# Altium PCB current_integrator.PcbDoc
Units mil, origin at the board's own origin, x right, y up, seen from the top; angles counter-clockwise.
Board outline 3254.13 x 2228.48 mil, 4 copper layers (Top Layer, Ground layer, Power Layer, Bottom Layer); 114 components, 75 nets, 393 pads, 95 vias.
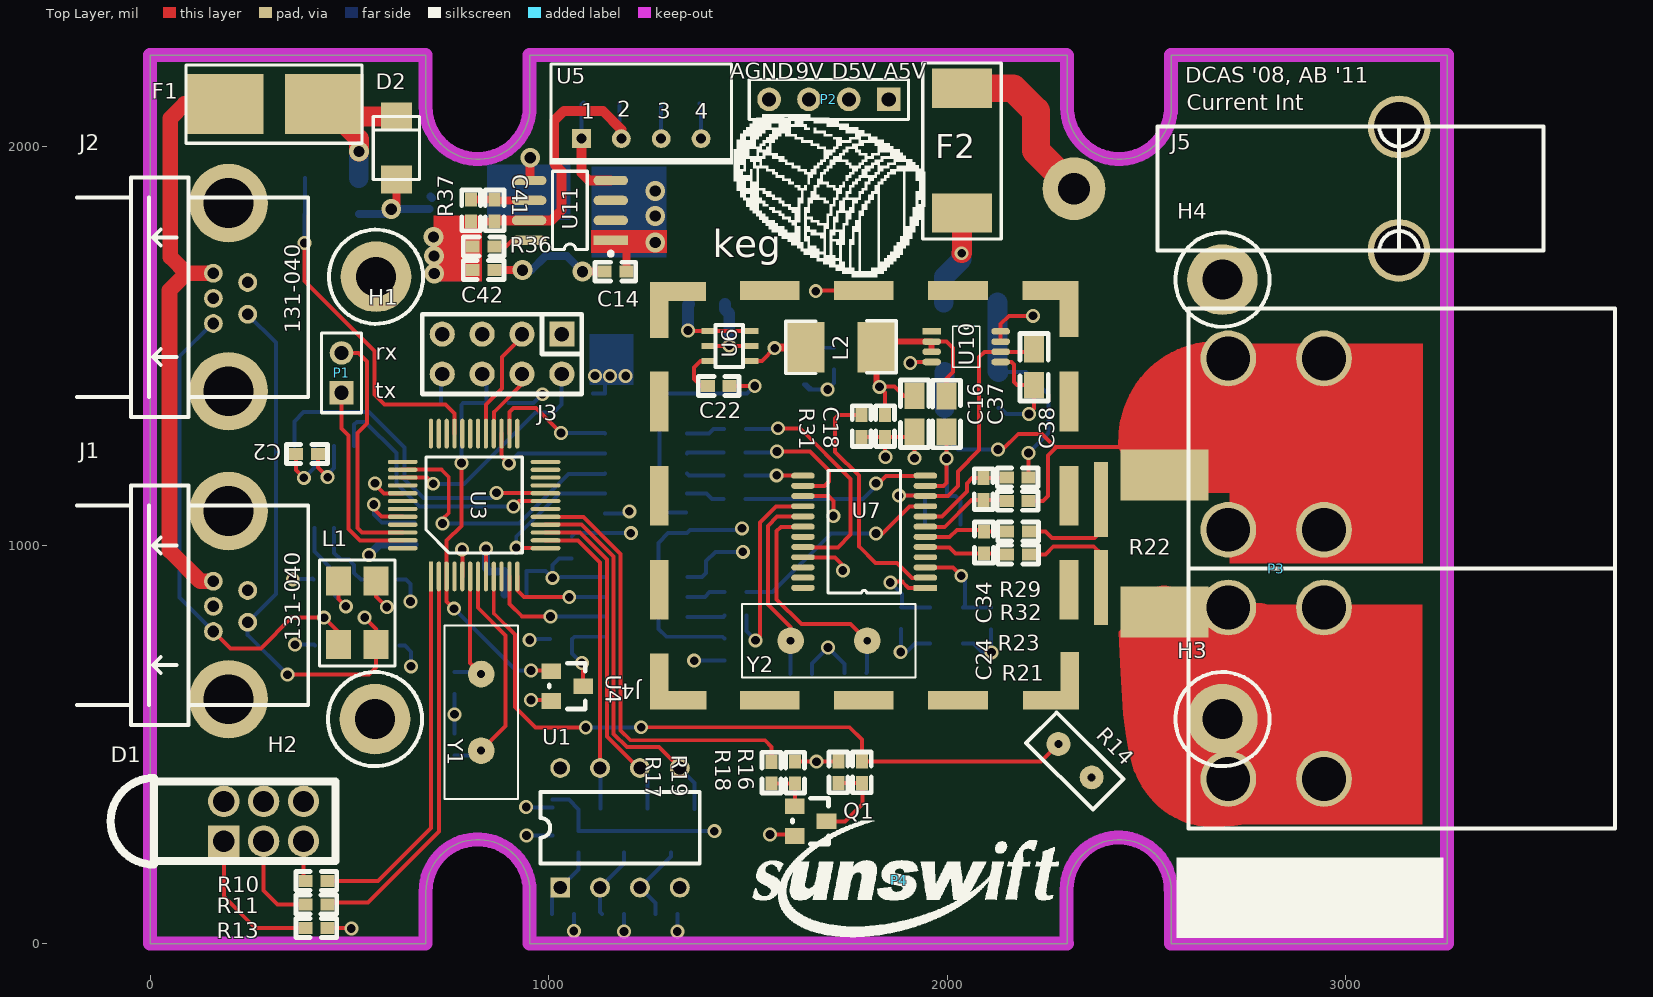
[diagram p0: Top Layer view]
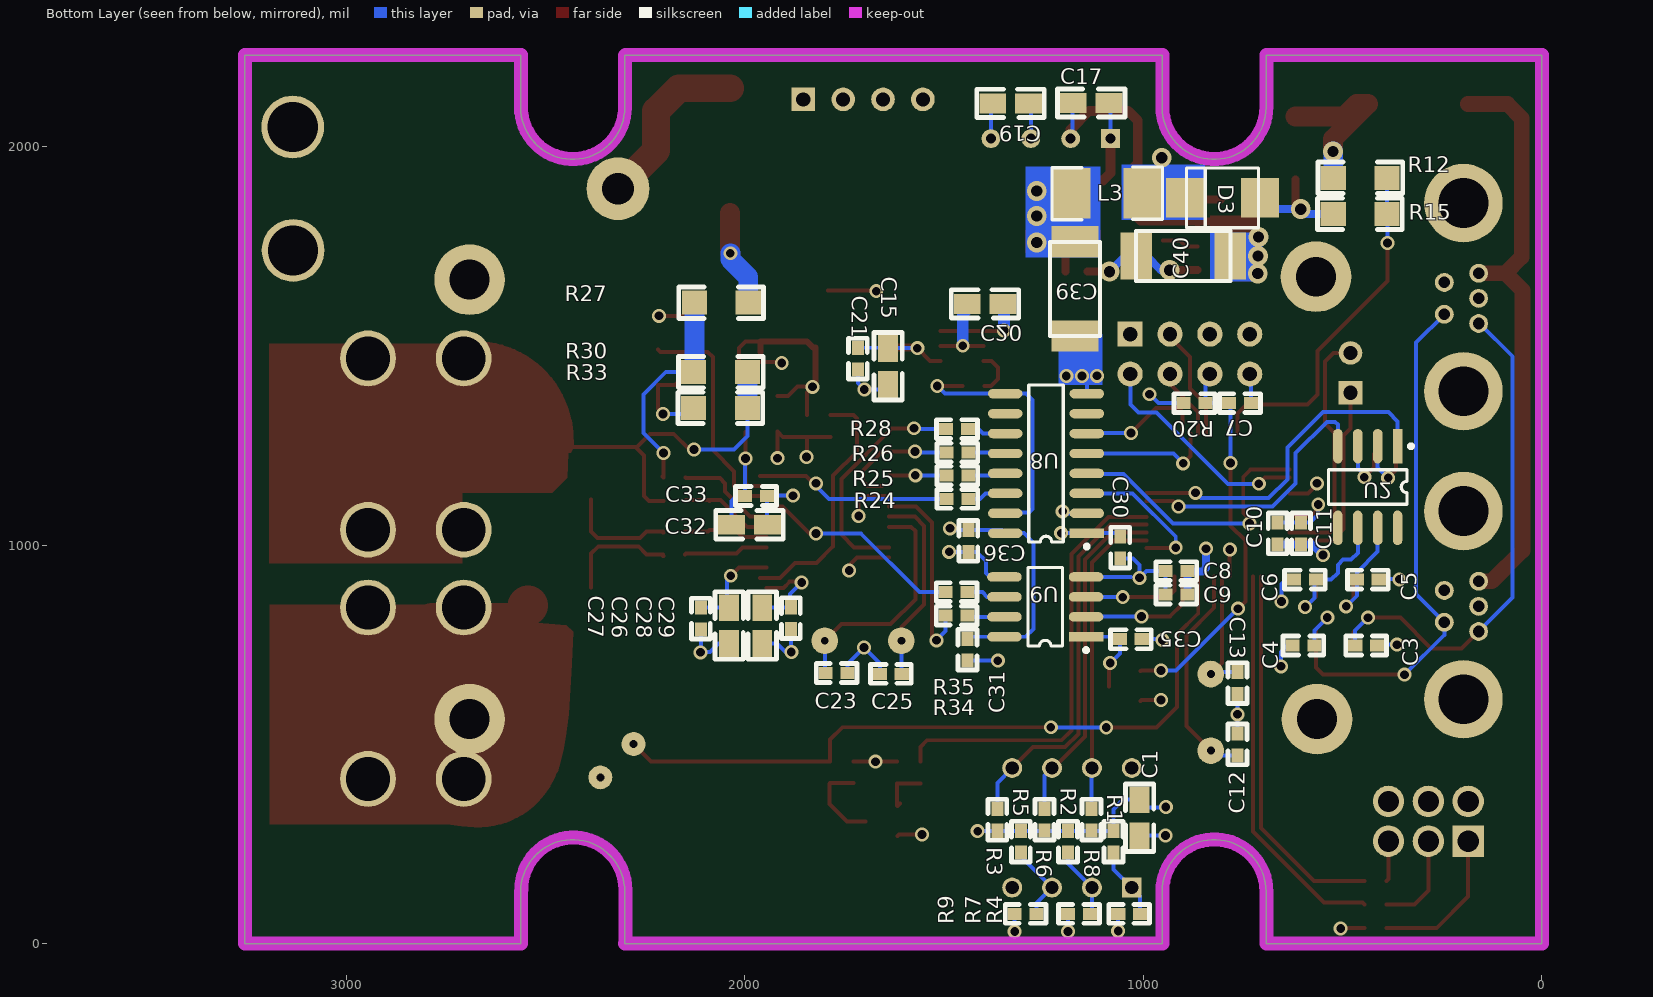
[diagram p1: Bottom Layer view, seen from below]
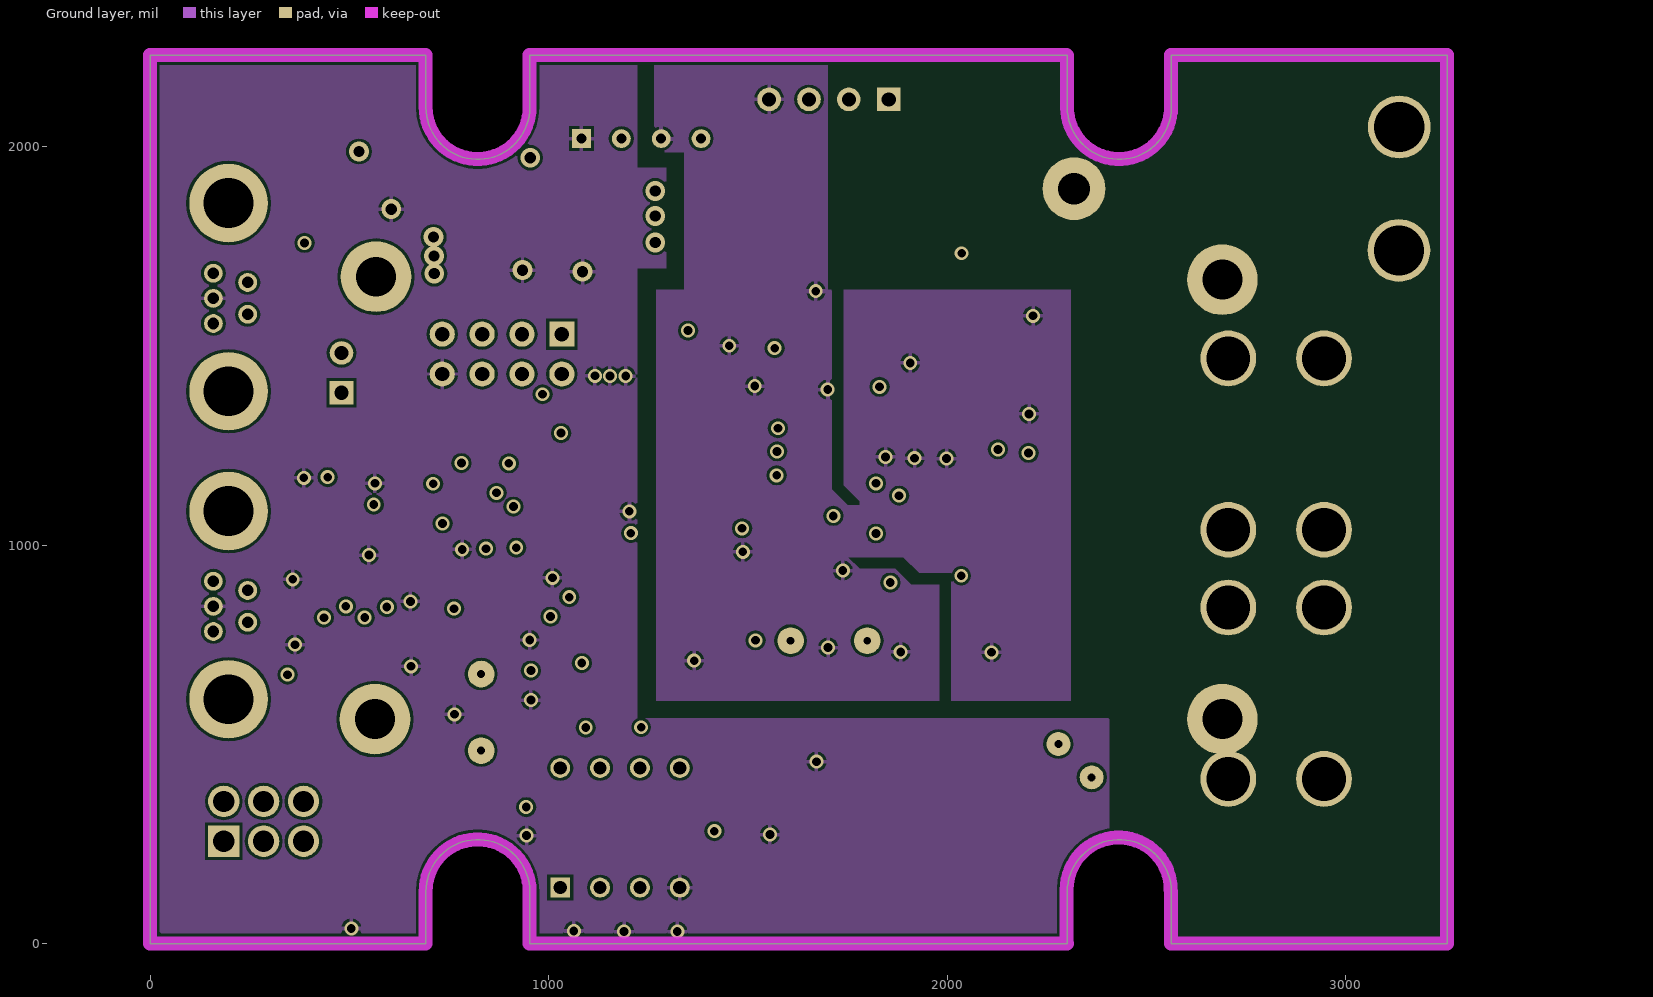
[diagram p2: Ground layer]
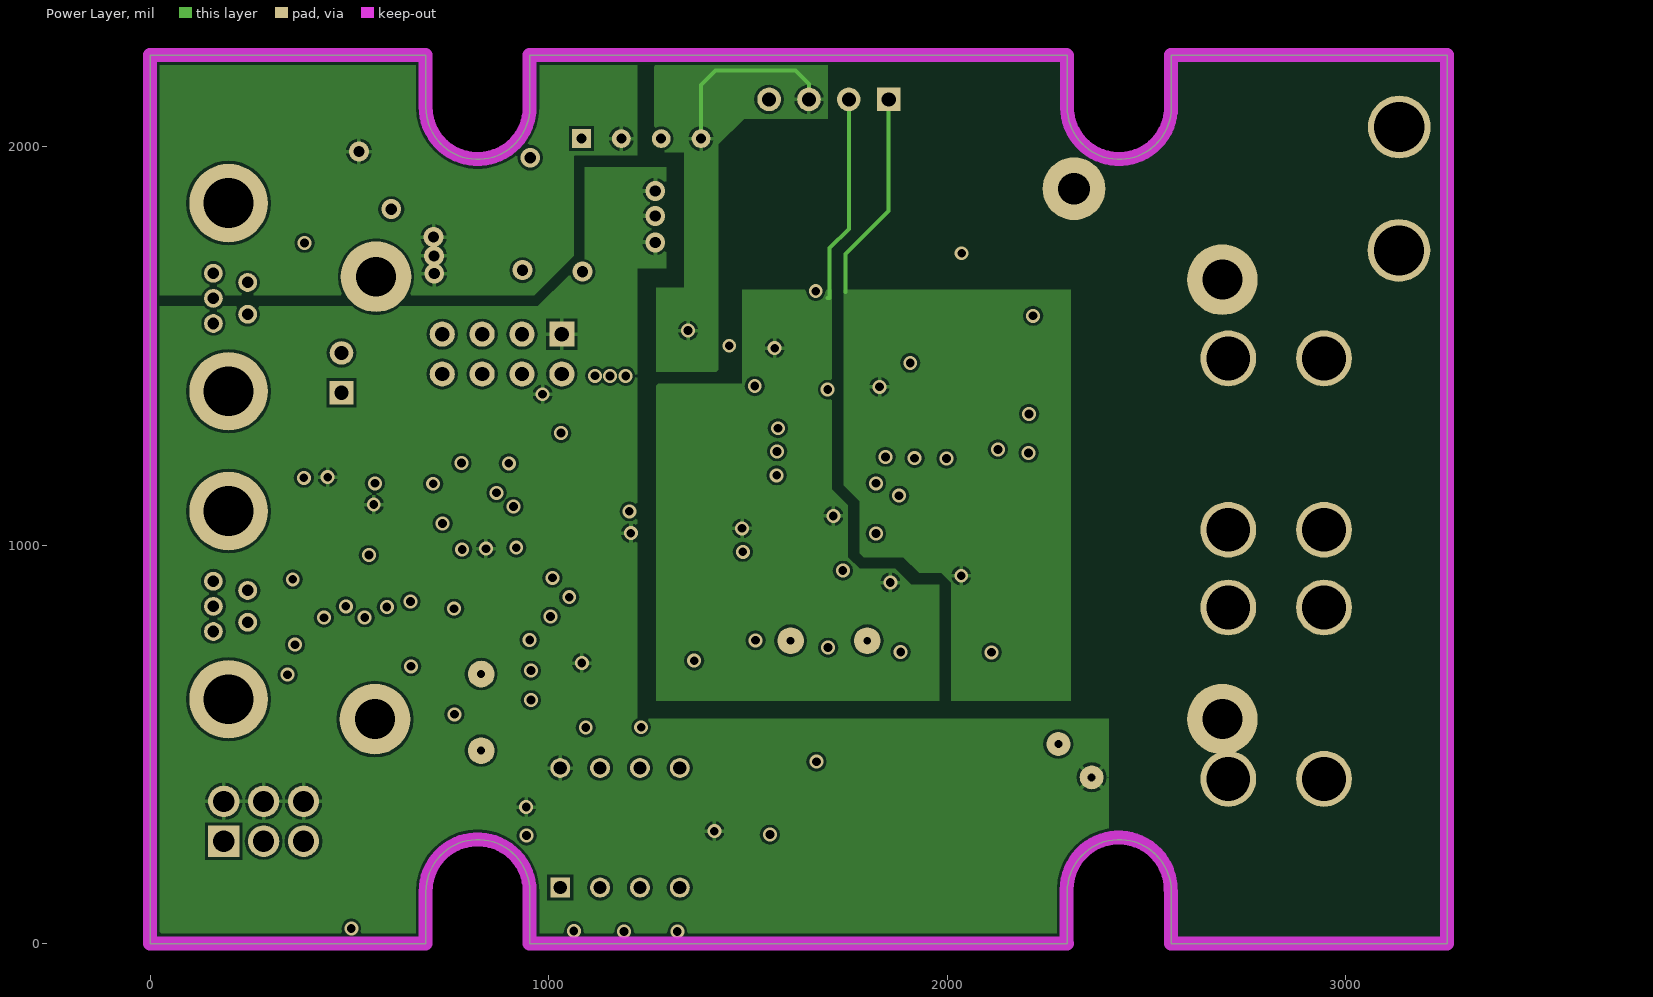
[diagram p3: Power Layer]

## Layer stack, top to bottom
Top Layer: signal copper 1.4
Dielectric: core 12.6, FR-4, Dk 4.8
Ground layer: signal copper 1.4
Dielectric: prepreg 12.6, FR-4, Dk 4.8
Power Layer: signal copper 1.4
Dielectric: core 12.6, FR-4, Dk 4.8
Bottom Layer: signal copper 1.4

## Board outline
0,0 691.92,0.1 691.92,130.44 cw(c822.43,130.44) 952.94,130.44 952.94,0 2300.98,0 2300.98,130.44 cw(c2431.49,130.44) 2562,130.44 2562,0 3254.13,0 3254.13,2228.48 3253.93,2228.48 2562,2228.48 2562,2098.16 cw(c2431.49,2098.16) 2300.98,2098.16 2300.98,2228.48 952.94,2228.48 952.94,2098.16 cw(c822.43,2098.16) 691.92,2098.16 691.92,2228.48 0,2228.48

## Design rules (kind name [scope] priority, off if disabled: settings)
Clearance [All] p1: gap=7.09
ComponentClearance [All] p1 off: gap=7.09 collisioncheckmode=3 verticalgap=100000 showdistances=TRUE
FabricationTestPointUsage TestPointUsage [All] p1: valid=0 allowmultiple=FALSE
FabricationTestpoint Testpoint [All] p1: side=3 testpointundercomponent=TRUE minsize=40 maxsize=100 preferedsize=60 minholesize=0 maxholesize=40 preferedholesize=32 testpointgrid=1 allowsidetop=TRUE allowsidebottom=TRUE usegrid=TRUE gridtolerance=0.01
HoleSize [All] p1: absolutevalues=TRUE maxlimit=393.7 minlimit=1 maxpercent=80.000 minpercent=20.000
HoleToHoleClearance [All] p1: gap=7.09 allowstackedmicrovias=TRUE
MinimumSolderMaskSliver [All] p1: minsoldermaskwidth=0.39
PolygonConnect [All] p1: connectstyle=Relief reliefconductorwidth=10 reliefentries=4 polygonreliefangle="90 Angle"
RoutingCorners [All] p1: cornerstyle=45-Degree minsetback=39.37 maxsetback=39.37
RoutingVias [All] p1: holewidth=16 width=35 viastyle="Through Hole" minholewidth=16 minwidth=35 maxholewidth=16 maxwidth=35
SilkToSilkClearance [All] p1 off: silktosilkclearance=10
SilkscreenOverComponentPads [All] p1 off: minsilkscreentomaskgap=10
SolderMaskExpansion [All] p1: expansion=4
Width [All] p1: maxlimit=393.7 minlimit=10 preferedwidth=10
19 further rules are at their usual default settings.

## Classes and differential pairs
component class U_3V-Switcher-50mA: C39 C40 C41 C42 D3 L3 R36 R37 U11
component class TopLevel: C1 D1 H1 H2 H3 H4 ID1 P1 Q1 R1 R2 R3 R4 R5 R6 R7 R8 R9 R10 R11 R12 R13 R14 R15 R16 R17 R18 R19 TP1 TP2 TP3 TP4 TP5 TP6 TP7 TP8 TP9 TP10 TP11 TP12 U1
component class MCP3909: 9V A5V C15 C16 C17 C18 C19 C20 C21 C22 C23 C24 C25 C26 C27 C28 C29 C30 C31 C32 C33 C34 C35 C36 C37 C38 F2 J4 J5 L2 P2 P3 R21 R22 R23 R24 R25 R26 R27 R28 R29 R30 R31 R32 R33 R34 R35 TP15 U5 U6 U7 U8 U9 U10 Y2
component class LPC11c14: C7 C8 C9 C10 C11 C12 C13 C14 J3 R20 U3 U4 Y1
component class 3V3-CAN-UNISOLATED: C2 C3 C4 C5 C6 D2 F1 J1 J2 L1 U2

## Components (designator, comment, footprint, x,y, rotation, side; value= is the part's Value field where it differs from the comment)
C1 "0.1uF" 0805 1009.29,361.18 r270 bottom
C2 "100nF" 0603 366.14,1228.35 r0 top
C3 "100nF" 0603 413.5,748.03 r0 bottom
C4 "100nF" 0603 570.87,748.03 r0 bottom
C5 "100nF" 0603 464.45,913.39 r180 bottom
C6 "100nF" 0603 567.05,913.39 r0 bottom
C7 "10nF" 0603 785.04,1355.91 r180 bottom
C8 "10nF" 0603 944.61,934.72 r180 bottom
C9 "100nF" 0603 944.61,875.67 r180 bottom
C10 "10nF" 0603 663.13,1001.72 r90 bottom
C11 "100nF" 0603 604.07,1001.72 r90 bottom
C12 "18pF" 0603 763.78,472.44 r90 bottom
C13 "18pF" 0603 763.78,681.1 r270 bottom
C14 "100nF" 0603 1194.96,1685.96 r180 top
C15 "10u" 0805 1640,1403 r90 bottom
C16 "10u" 0805 1918,1284.45 r90 top
C17 "1uF" 0805 1176,2109 r180 bottom
C18 "100nF" 0603 1844,1326 r270 top
C19 "10u" 0805 1288,2108 r0 bottom
C20 "1uF" 0805 1352,1605 r0 bottom
C21 "100nF" 0603 1716,1495 r270 bottom
C22 "18pF" 0603 1454,1399 r180 top
C23 "18pF" 0603 1797,679 r180 bottom
C24 "2.2nF" 0603 2092,1034 r270 top
C25 "100n" 0603 1606,677 r0 bottom
C26 "10u" 0805 2039,753 r90 bottom
C27 "100nF" 0603 2110,843 r270 bottom
C28 "10u" 0805 1956,753 r90 bottom
C29 "100nF" 0603 1884,789 r90 bottom
C30 "100nF" 0603 1057.87,966.22 r90 bottom
C31 "100nF" 0603 1441,710 r90 bottom
C32 "10u" 0805 2033,1051 r180 bottom
C33 "100nF" 0603 1944,1123 r0 bottom
C34 "2.2nF" 0603 2091,1168 r270 top
C35 "100nF" 0603 1003.94,763.78 r0 bottom
C36 "100nF" 0603 1439,983 r90 bottom
C37 "0.1uF" 0805 1998,1374 r270 top
C38 "1uF" 0805 2218,1401 r90 top
C39 "4u7 35V" MCCT-CASEC 1171.45,1760.76 r270 bottom
C40 "4u7 35V" MCCT-CASEC 781.69,1725.33 r0 bottom
C41 "1n" 0603 864.37,1811.94 r90 top
C42 "100nF" 0603 809.25,1689.89 r0 top
D1 "1882-2781" LED_TRILEVEL 185.01,257.06 r90 top
D2 "12V Transient Suppressor" SMA 618.11,1996.06 r90 top
D3 "MBRS130" SMB 801.37,1870.99 r0 bottom
F1 "125mA/3A" LITTELFUSE-154 311.02,2106.3 r0 top
F2 "125mA/3A" LITTELFUSE-154-250V 1956.29,1771.98 r90 top
H1 "HOLE" M2.5 566.93,1673.23 r0 top
H2 "HOLE" M2.5 564.17,563.39 r0 top
H3 "HOLE" M2.5 2690.16,563.39 r0 top
H4 "HOLE" M2.5 2690.16,1665.75 r0 top
J1 "CON5-S" TRIAD5F 244.85,886.19 r90 top
J2 "CON5-S" TRIAD5F 244.85,1658.83 r90 top
J3 "LPC SWD Connector" IDC8 1033.07,1529.13 r180 top
J4 "Shield" BMIS-203-SHIELD 2328.74,1662.01 r180 top locked
J5 "POWERPOLE(MINI)" POWERPOLE25A 1782.8,1893.96 r270 top
L1 "CHOKE" Epcos-Choke 472.44,909.45 r0 top
L2 "CHOKE" 1812 1644.83,1496 r0 top
L3 "330uH" 1812 1002.16,1882.81 r0 bottom
P1 "UART" HDR1X2 480.32,1381.89 r90 top
P2 "Header 4" HDR1X4 1853,2118 r180 top
P3 "MiniPowerclaw" MiniPowerpole-Hrz 2704.88,843.39 r0 top (schematic designator P1)
P4 "SUN_LOGO" SUNSWIFTLOGO 1879,159 r0 top (schematic designator P1)
Q1 "ZXM61N02F" SOT23-3 1616.85,345.09 r270 top
R1 "0R" 0603 1074.8,228.23 r90 bottom
R2 "0R" 0603 1188.98,228.35 r90 bottom
R3 "0R" 0603 1366.14,338.46 r270 bottom
R4 "0R" 0603 1062.99,74.8 r180 bottom
R5 "0R" 0603 1307.09,228.35 r90 bottom
R6 "0R" 0603 1248.03,338.58 r270 bottom
R7 "0R" 0603 1188.98,74.8 r180 bottom
R8 "0R" 0603 1129.92,338.58 r270 bottom
R9 "0R" 0603 1322.83,74.8 r180 bottom
R10 "1K" 0603 389.88,157.48 r0 top
R11 "1K" 0603 389.76,98.43 r0 top
R12 "100K" 1206 388.62,1921.26 r0 bottom
R13 "1K" 0603 389.88,39.37 r0 top
R14 "NTC, 10k" NTC_EPCOS 2362.2,417.32 r135 top
R15 "20K" 1206 523.62,1830.71 r180 bottom
R16 "9k1" 0603 1785.68,457.59 r270 top
R17 "100R" 0603 1559.06,401.57 r90 top
R18 "0R" 0603 1726.62,457.59 r270 top
R19 "10K" 0603 1618.11,401.69 r90 top
R20 "10k" 0603 844.09,1355.91 r0 bottom
R21 "7k15" 0603 2150,976 r0 top
R22 "BVR, 0R0005" BVR 2368.11,1437.01 r270 top
R23 "7k15" 0603 2150,1034 r0 top
R24 "0R" 0603 1494,1116 r180 bottom
R25 "0R" 0603 1494,1174 r180 bottom
R26 "0R" 0603 1494,1232 r180 bottom
R27 "330k" 1206 2126,1608 r180 bottom
R28 "0R" 0603 1495,1291 r180 bottom
R29 "7k15" 0603 2149,1170 r0 top
R30 "1k2" 1206 1993,1434 r0 bottom
R31 "1k" 0603 1785,1326 r270 top
R32 "7k15" 0603 2149,1111 r0 top
R33 "0R" 1206 2128,1344 r180 bottom
R34 "0R" 0603 1496,823 r180 bottom
R35 "0R" 0603 1496,882 r180 bottom
R36 "100k" 0603 864.37,1748.95 r180 top
R37 "1R2" 0603 805.31,1811.94 r90 top
U1 "24AA256" DIP8 1028.98,140.71 r90 top
U2 "SN65HVD232" SO8 437.01,1145.67 r0 bottom
U3 "LPC11C14" Quad48-LPC11c14 704.72,921.26 r90 top
U4 "XC61CN2002MR" SOT23-3 1006.61,683.67 r270 top
U5 "NKE1209SC" NPSIP4 1232.28,2019.68 r0 top
U6 "Pq1R30" SOT23-6 1404.94,1536.8 r270 top
U7 "MCP3909" SOP24-wide 1945,892.64 r180 top
U8 "IL717" SO16 1244.09,1204.72 r90 bottom
U9 "IL711" SO8 1246.06,845 r90 bottom
U10 "LTC6652" "SOP8 - duplicate" 1960.77,1536 r0 top
U11 "LTC1474" SO8 1053.34,1839.5 r90 top
Y1 "12 MHz" HC49/4H#1 830.71,797.83 r270 top
Y2 "3.579545" HC49/4H#2 1485.54,760 r0 top

## Footprints (in the part's own frame and the unit in brackets; to place one, negate y for a bottom-side part, rotate by r counter-clockwise, add the part's x,y. Pads: shape width x height; smd on the part's side, far side on the other; paste and mask are expansions set on the pad)
0603 [mil]
  rect 35.43x30 smd: 1(0,0) 2(55,0)
  silkscreen extent -24,-24 79,24
0805 [mm]
  rect 1.7x1.27 smd: 1(0,0) 2(2.286,0)
  silkscreen extent -1,-0.9 3.3,0.9
1206 [mil]
  rect 62.99x60 smd: 1(0,0) 2(135,0)
  silkscreen extent -39,-39 173,39
1812 [mm]
  rect 2.4x3.2 smd: 1(0,0) 2(4.5,0)
  silkscreen extent -1.27,-1.66 5.77,1.7
BMIS-203-SHIELD [mm]
  rect 3.8x1.2 smd: 1(13.67,0.6) ""(7.67,26.7) ""(7.67,0.6) ""(13.67,26.7) ""(19.67,26.7) ""(19.67,0.6)
  rect 1.2x3.57 smd: ""(0.55,25.415) ""(0.6,1.785) ""(26.7,25.515) ""(26.7,1.835)
  rect 1.2x3.8 smd: ""(0.6,19.67) ""(0.6,13.67) ""(0.6,7.67) ""(26.7,7.67) ""(26.7,13.67) ""(26.7,19.67)
  rect 3.57x1.2 smd: ""(1.735,26.7) ""(1.785,0.6) ""(25.465,26.7) ""(25.5,0.65)
BVR [mm]
  rect 4.8x0.9 smd: 1(13.8,0.45) 2(8.2,0.45)
  rect 3.25x5.6 smd: 3(15.375,4.5) 4(6.625,4.5)
DIP8 [mil]
  rect 50x50 hole 33: 1(0,0)
  round 50 hole 33: 2(0,-100) 3(0,-200) 4(0,-300) 5(300,-300) 6(300,-200) 7(300,-100) 8(300,0)
  silkscreen extent 60,-350 240,50
Epcos-Choke [mm]
  rect 1.6x1.85 smd paste+0: 1(0,-4.05)
  rect 1.6x1.85 smd: 2(2.4,-4.05) 3(2.4,0) 4(0,0)
  silkscreen extent -1.2,-5.4 3.6,1.35
HC49/4H#1 [mm]
  round 1.7 hole 0.508: 1(3.085,0) 2(7.965,0)
  silkscreen extent 0,-2.35 11.05,2.35
HC49/4H#2 [mm]
  round 1.7 hole 0.5: 1(3.085,0) 2(7.965,0)
  silkscreen extent 0,-2.35 11.05,2.35
HDR1X2 [mm] "Connector; Header; 2 Position"
  rect 1.5x1.5 hole 0.914: 1(0,0)
  round 1.5 hole 0.914: 2(2.54,0)
  silkscreen extent -1.27,-1.27 3.81,1.27
HDR1X4 [mm] "Connector; Header; 4 Position"
  rect 1.5x1.5 hole 0.9: 1(0,0)
  round 1.5 hole 0.9: 2(2.54,0) 3(5.08,0) 4(7.62,0)
  silkscreen extent -1.27,-1.27 8.89,1.27
IDC8 [mm]
  rect 1.6x1.6 hole 0.914: 1(0,0)
  round 1.6 hole 0.914: 2(0,2.54) 3(2.54,0) 4(2.54,2.54) 5(5.08,0) 6(5.08,2.54) 7(7.62,0) 8(7.62,2.54)
  silkscreen extent -1.27,-1.27 8.89,3.81
LED_TRILEVEL [mm]
  rect 2x2 hole 1.346: 1(0,0)
  round 2 hole 1.346: 2(0,-2.54) 3(0,-5.08) 4(2.54,-5.08) 5(2.54,-2.54) 6(2.54,0)
  silkscreen extent -1.49,-7.11 4.03,7.21
LITTELFUSE-154 [mm]
  rect 5x3.81 smd: 1(-3.185,0) 2(3.185,0)
  silkscreen extent -5.6,-2.51 5.6,2.5
LITTELFUSE-154-250V [mm]
  rect 2.5x3.81 smd: 1(1.55,-2.05) 2(9.5,-2.05)
  silkscreen extent -0.1,-4.56 11.1,0.45
M2.5 [mm]
  round 4.5 hole 2.54: 1(0,0)
  silkscreen extent -3,-3 3,3
MCCT-CASEC [mm]
  rect 2x3 smd: 1(0,0) 2(6,0)
  silkscreen extent 0,-1.6 6,1.6
MiniPowerpole-Hrz [mil]
  round 140 hole 110: 1(0,195) 1(0,625) 1(240,195) 1(240,625) 2(0,-430) 2(0,0) 2(240,-430) 2(240,0)
  silkscreen extent -100,-555 970,750
NPSIP4 [mm]
  rect 1.2x1.2 hole 0.635: 1(-3.81,0)
  round 1.2 hole 0.635: 2(-1.27,0) 3(1.27,0) 4(3.81,0)
  silkscreen extent -5.85,-1.65 5.86,4.75
NTC_EPCOS [mil]
  round 60 hole 20: 1(0,0) 2(118.11,0)
  silkscreen extent -59,-53 177,55
POWERPOLE25A [mil]
  round 157.48 hole 80: 1(0,535)
  silkscreen extent -156,744 156,1713
Quad48-LPC11c14 [mm]
  rect 1.9x0.27 smd: 1(0,0)
  oval 1.9x0.27 smd: 2(0,-0.5) 3(0,-1) 4(0,-1.5) 5(0,-2) 6(0,-2.5) 7(0,-3) 8(0,-3.5) 9(0,-4) 10(0,-4.5) 11(0,-5) 12(0,-5.5) 25(9.1,-5.5) 26(9.1,-5) 27(9.1,-4.5) 28(9.1,-4) 29(9.1,-3.5) 30(9.1,-3) 31(9.1,-2.5) 32(9.1,-2) 33(9.1,-1.5) 34(9.1,-1) 35(9.1,-0.5) 36(9.1,0)
  oval 0.27x1.9 smd: 13(1.8,-7.3) 14(2.3,-7.3) 15(2.8,-7.3) 16(3.3,-7.3) 17(3.8,-7.3) 18(4.3,-7.3) 19(4.8,-7.3) 20(5.3,-7.3) 21(5.8,-7.3) 22(6.3,-7.3) 23(6.8,-7.3) 24(7.3,-7.3) 37(7.3,1.8) 38(6.8,1.8) 39(6.3,1.8) 40(5.8,1.8) 41(5.3,1.8) 42(4.8,1.8) 43(4.3,1.8) 44(3.8,1.8) 45(3.3,1.8) 46(2.8,1.8) 47(2.3,1.8) 48(1.8,1.8)
  silkscreen extent 1.48,-5.81 7.61,0.32
SMA [mm]
  rect 1.8x2 smd: A(-2,0) K(2,0)
  silkscreen extent -2,-1.48 2,1.48
SMB [mm]
  rect 2.4x2.5 smd: A(-2.385,0) K(2.385,0)
  silkscreen extent -2.28,-1.9 2.3,1.9
SO8 [mm]
  rect 0.6x2.2 smd: 1(-1.905,-2.6)
  oval 0.6x2.2 smd: 2(-0.635,-2.6) 3(0.635,-2.6) 4(1.905,-2.6) 5(1.905,2.6) 6(0.635,2.6) 7(-0.635,2.6) 8(-1.905,2.6)
  silkscreen extent -2.88,-2.72 2.5,1.1
SO16 [mm]
  rect 0.6x2.2 smd: 1(-4.445,-2.6)
  oval 0.6x2.2 smd: 2(-3.175,-2.6) 3(-1.905,-2.6) 4(-0.635,-2.6) 5(0.635,-2.6) 6(1.905,-2.6) 7(3.175,-2.6) 8(4.445,-2.6) 9(4.445,2.6) 10(3.175,2.6) 11(1.905,2.6) 12(0.635,2.6) 13(-0.635,2.6) 14(-1.905,2.6) 15(-3.175,2.6) 16(-4.445,2.6)
  silkscreen extent -5.42,-2.72 5,1.1
"SOP8 - duplicate" [mm]
  rect 1.2x0.42 smd: 1(0,0)
  oval 1.2x0.42 smd: 2(0,-0.65) 3(0,-1.3) 4(0,-1.95) 5(4.4,-1.95) 6(4.4,-1.3) 7(4.4,-0.65) 8(4.4,0)
  silkscreen extent 1.33,-2.28 3.07,0.33
SOP24-wide [mm]
  rect 1.5x0.38 smd: 1(0,0)
  oval 1.5x0.38 smd: 2(0,-0.65) 3(0,-1.3) 4(0,-1.95) 5(0,-2.6) 6(0,-3.25) 7(0,-3.9) 8(0,-4.55) 9(0,-5.2) 10(0,-5.85) 11(0,-6.5) 12(0,-7.15) 13(7.8,-7.15) 14(7.8,-6.5) 15(7.8,-5.85) 16(7.8,-5.2) 17(7.8,-4.55) 18(7.8,-3.9) 19(7.8,-3.25) 20(7.8,-2.6) 21(7.8,-1.95) 22(7.8,-1.3) 23(7.8,-0.65) 24(7.8,0)
  silkscreen extent 1.58,-7.48 6.22,0.33
SOT23-3 [mm]
  rect 1x1.25 smd: 1(0,0) 2(1.905,0) 3(0.965,2.032)
  silkscreen extent -0.51,-0.13 2.41,2.16
SOT23-6 [mm]
  rect 0.4x0.9 smd: 1(0,-0.1) 2(0.95,-0.1) 3(1.9,-0.1) 4(1.9,2.65) 5(0.95,2.65) 6(0,2.65)
  silkscreen extent -0.4,0.35 2.3,2.1
SUNSWIFTLOGO [mil] "Sunswift Logo"
  silkscreen extent -367,-141 401,150
TRIAD5F [mil]
  round 196.85 hole 125: 0(-273,48) 0(199,48)
  round 47.24 hole 29: 1(0,0) 2(23,86) 3(-40,86) 4(-103,86) 5(-80,0)
  silkscreen extent -337,-152 263,428

## Part data
C1 C2 C3 C4 C5 C6 C7 C8 C9 C10 C11 C12 C13 C14 C15 C16 C17 C18 C19 C20 C21 C22 C23 C24 C25 C26 C27 C28 C29 C30 C31 C32 C33 C34 C35 C36 C37 C38 C41 C42: library part CAP, "Capacitor"
C39 C40: library part "Cap Pol3", "Polarized Capacitor (Surface Mount)"
D1: library part LED-TRILEVEL, "Three level LED"
D2: library part DIODE, "Diode"
D3: library part "D SCHOTTKY", "Schottky Diode"
F1 F2: library part FUSE2, "Fuse"
H1 H2 H3 H4: "Hole"
J1 J2: "Connector, 2 pin, with shield @ S"
J3: library part LPCLink_Connector
J4: library part Socket, "Socket"
J5: library part CON1
L2: library part INDUCTOR, "Inductor"
L3: library part Inductor, "Inductor"
P1: library part "Header 2", "Header, 2-Pin"
P2: "Header, 4-Pin"
P3: library part SUN_LOGO
Q1: "1.7A, 20V N-Channel Enhancement mode FET"
R1 R2 R3 R4 R5 R6 R7 R8 R9 R10 R11 R12 R13 R15 R16 R17 R18 R19 R20 R21 R23 R24 R25 R26 R28 R29 R30 R31 R32 R33 R34 R35 R36 R37: library part RES1, "Resistor"
R14: library part "Res Varistor", "Varistor (Voltage-Sensitive Resistor)"
R22: library part BVR
R27: library part RES1
U2: "3.3V CAN Transciever"
U3: library part LPC11C14_Full
U4: library part XC61F, "SOT23 reset generator"
U5: library part LME1209S, "Isolated 250mW Single Output"
U7: "Energy Measurement IC"
U8: "Isoloop IL717 - www.nve.com"
U9: "IL711 Optical Isolator"
U11: "Step-down converter"
Y1 Y2: library part CRYSTAL, "Crystal"

## Free pads (board coordinates)
  round 157.48 hole 125.98: 0(3132.85,1739.27) 0(3133.87,2048.67)

## Via types
v1: diameter 35, hole 22, Top Layer to Bottom Layer, 84 vias
v2: diameter 50, hole 28, Top Layer to Bottom Layer, 11 vias

## Nets (pads, with @x,y where several pads share a name; then routed paths per layer and width w, separated by ;. In a path a pad name is that pad's centre, name@x,y a point inside that pad or via, vN(x,y) a via of type N, cw(c..) or ccw(c..) an arc to the next point about the centre after c; other vN are vias at no path point)
2V5REF: C32.2 C33.1 C38.2 U7.10 U10.6 | length 788.5
  Top Layer w10: v1(1879,1124) 1943.95,1124 U7.10 2001.95,1122.95 2027,1148 2027,1185 2080,1238 2080,1472 2092.82,1484.82 U10.6 2211.82,1484.82 C38.2
  Bottom Layer w10: v1(1879,1124) 1943,1124 C33.1 1944,1052 C32.2
3V3: C1.1 C2.2 C8.2 C9.2 C10.2 C11.2 C14.1 C30.2 C35.2 C39.1 D1.4 D1.5 D1.6 J3.1 L3.2 R1.2 R2.2 R3.2 R5.2 R6.2 R8.2 R14.1 R20.2 U1.8 U2.3 U3.8 U3.44 U4.3 U8.1 U9.1 U11.1 | length 1787
  Top Layer w10: C2.2 421.14,1194.83 v1(445.68,1170.3) ; v1(561.22,1101.7) 561.22,1090.91 580.93,1071.2 633.52,1071.2 U3.44 ; U3.8 842.52,990.82 v1(842.68,990.98) ; v1(1083.05,704.08) 1086.61,700.51 U4.3
  Top Layer w20: U11.1 1261.53,1764.5 v2@1266.68,1759.35 ; C14.1 1194.96,1751.62
  Bottom Layer w10: v1(445.68,1170.3) 445.68,1177.26 462.01,1193.6 U2.3 ; v1(561.22,1101.7) 561.22,1076.75 581.24,1056.72 C11.2 C10.2 ; R20.2 962.4,1355.91 v1(984.78,1378.29) ; v1(943.62,342.67) 944.79,341.5 C1.1@1009.29,341.5 ; C1.1 1050.67,361.18 1074.8,337.05 R1.2 1365.91,283.23 1366.98,282.15 v1(1415.61,282.15) ; C30.2 1066.38,1029.72 U8.1 v1(1206.16,1029.72) ; v1(1083.05,704.08) 1058.94,728.19 C35.2 1065.16,770 U9.1
  Bottom Layer w20: v1(842.68,990.98) 842.68,942.32 851,934 888.88,934 C8.2 C9.2
  other v2: 1267.42,1759.35 1267.42,1825.76 1267.42,1888.49
9V: C19.2 C20.1 P2.3 U5.4 U6.1 U6.6 | length 803.5
  Top Layer w10: v1(1349.61,1538) 1350.8,1536.8 U6.1 U6.6
  Power Layer w10: U5.4 1382.28,2154.28 1419,2191 1619,2191 1653,2157 P2.3
  Bottom Layer w10: U5.4@1374.02,2027.95 U5.4 1382.28,2103.72 C19.2
  Bottom Layer w30: v1(1349.61,1538) 1349.61,1602.61 C20.1
12V: C17.1 C40.1 C41.1 C42.1 D2.K F1.2 R12.2 R36.2 R37.1 U5.2 U11.7 | length 1328.3
  Top Layer w10: C41.1 C41.1@867.46,1808.85
  Top Layer w20: C42.1 809.37,1690.01 R36.2 805.31,1753 R37.1 C41.1
  Top Layer w25: C41.1 866.92,1814.5 U11.7 1006.5,1814.5 1032,1840 1032,1938.62 1014,1956.62 1014,2065 1038,2089 1136,2089 1182.28,2042.72 U5.2
  Top Layer w50: v2(524.07,1987.26) 524.07,2018.65 F1.2 464.54,2106.3 496.03,2074.8 D2.K
  Bottom Layer w10: v2@523.62,1986.81 v2(524.07,1987.26) ; C17.1@1177.17,2110.24 1177.17,2024.8 U5.2
  Bottom Layer w50: R12.2 v2@523.62,1986.81
  other v2: 712.98,1681.03 712.03,1725.42 711.22,1772.5
12V_MEASURE: R12.1 R15.2 U3.33 | length 887.4
  Top Layer w10: v1(387.52,1757.89) 387.52,1662.06 563,1486.58 563,1378.08 588.64,1352.44 741.25,1352.44 763.78,1329.91 U3.33
  Bottom Layer w10: v1(387.52,1757.89) 387.52,1829.61 R15.2 R12.1
/RESET: C7.1 J3.6 R20.1 U3.3 U4.1 | length 985.9
  Top Layer w10: v1(762.56,840.45) 744.09,858.91 U3.3 744.09,1011.09 781.13,1048.13 v1(781.13,1205.76) ; v1(955.4,685.28) 1005,685.28 U4.1
  Bottom Layer w10: v1(762.56,840.45) 917.73,685.28 v1(955.4,685.28) ; v1(781.13,1205.76) 781.13,1352 C7.1 R20.1 844.09,1418.11 J3.6
A5V: C16.2 C18.1 C26.2 C27.1 C37.1 L2.2 P2.1 U7.3 U10.2 U10.3 | length 1418
  Top Layer w10: C18.1 1844,1383 v1(1830,1397) 1829,1398 1868,1398 1891.55,1374.45 C16.2 ; U7.3@1945,943.23 2014.77,943.23 v1(2035,923) ; U10.2 1997.59,1510.41 2014,1494 2014,1434 1998,1418 C37.1
  Top Layer w15: v1@1829,1398 1822,1405 L2.2 1829,1496 1843.41,1510.41 U10.2 U10.3 U10.3@1960.59,1485
  Power Layer w10: 1745,1635 1745,1730 1853,1838 P2.1
  Bottom Layer w10: v1(2035,923) 2044,914 2044,848 C26.2 C27.1
CAN_H: C3.2 J1.4 J2.4 L1.1 | length 1337.2
  Top Layer w10: J1.4 201.28,740.76 278.09,740.76 355.14,817.8 v1(436.1,817.8) 472.44,781.46 L1.1
  Bottom Layer w10: J1.4 74.08,867.96 74.08,1473.63 156.28,1555.83 J2.4 ; v1(436.1,817.8) 468.5,785.4 C3.2
CAN_L: C4.1 J1.5 J2.5 L1.2 | length 1454.8
  Top Layer w10: v1(345.06,674.78) 548.93,674.78 566.93,692.78 L1.2 566.93,789.78 v1(538.43,818.27)
  Bottom Layer w10: J2.5 316.03,1507.65 316.03,877.37 J1.5 244.85,774.99 v1(345.06,674.78) ; v1(538.43,818.27) 570.87,785.84 C4.1
D5V: C15.2 C21.1 C28.2 C29.2 C31.2 C36.2 L2.1 P2.2 U6.4 U7.1 U7.15 U8.16 U9.8 | length 1801.2
  Top Layer w10: U6.4 1535,1462 v1(1567,1494) ; U7.15 1702.05,1122.95 1714,1111 v1(1714,1073) ; v1(1857,906) 1859,908 1887,908 1902.95,892.05 U7.1@1945,892.05
  Top Layer w20: v1(1567,1494) 1569,1496 L2.1
  Power Layer w10: 1700,1620 1705,1620 1705,1745 1753,1793 P2.2
  Bottom Layer w10: C31.2 1436,770 U9.8 1295,770 1275,790 1275,1005 1299.72,1029.72 U8.16 1354.73,1038 C36.2 1481,1038 v1(1485,1042) ; v1(1567,1494) 1639,1494 C15.2 1642,1495 C21.1 ; v1(1857,906) 1886,877 1886,846 C29.2 1885,843 C28.2
GND: C1.2 C2.1 C3.1 C4.2 C5.2 C6.2 C7.2 C8.1 C9.1 C10.1 C11.1 C12.2 C13.2 C14.2 C17.2 C30.1 C35.1 C39.2 C40.2 C42.2 D2.A D3.A J1.3 J2.3 J3.8 Q1.2 R4.1 R7.1 R9.1 R13.2 R15.1 R18.1 R19.2 U1.4 U2.2 U3.5 U3.41 U4.2 U5.1 U8.2 U8.8 U9.4 U11.4 | length 2749.3
  Top Layer w10: C2.1 366.14,1188.34 v1(385.82,1168.66) ; R13.2 503.76,39.37 v1(504.91,38.22) ; v1(564,1155) 564,1153 587.08,1129.92 U3.41 ; v1(783,989) 784,988 783.46,987.46 U3.5 ; v1(952.37,761.85) v1@953.33,760.9 ; v1(955.33,611.2) 1004.08,611.2 U4.2 ; v1(1554.95,273.63) 1613.31,273.63 Q1.2 ; R19.2 v1(1671.83,456.69) 1671.96,456.82 1672.73,457.59 R18.1
  Top Layer w20: v2(605.06,1842.55) 618.11,1855.6 D2.A ; C42.2 934.02,1689.89 v2(934.32,1689.59) ; v2(1085.1,1685.8) 1085.26,1685.96 C14.2
  Top Layer w25: U5.1 1082.28,1933.71 1101.5,1914.5 U11.4
  Bottom Layer w10: v1(363.61,750.05) 411.49,750.05 C3.1 ; v1@365.98,915.4 407.44,915.4 C5.2 C5.2@406.96,915.87 ; v1(385.82,1168.66) 412.01,1194.84 U2.2 ; C6.2 641.61,913.39 653.09,901.91 v1(653.09,858.54) ; C4.2 639.1,748.03 654.79,732.34 v1(654.79,695.77) ; C7.2 730.04,1426.1 J3.8 ; v1(763.55,575.46) v1@763.78,575.23 ; C12.2 v1@763.78,575.23 ; C13.2 v1@763.78,575.23 ; v1(944.55,271.18) C1.2 ; C9.1 C8.1 992.31,934.72 v1(1009.26,917.78) ; v1(952.37,761.85) 952.37,763.78 C35.1 ; v1@1011.48,920 v1(1009.26,917.78) ; 1030.86,920 U9.4 ; C30.1 1025.74,966.22 1009.26,949.74 v1(1009.26,917.78) ; v1(1062.99,32.14) R4.1 ; U5.1 1082.28,2105.35 C17.2@1087.17,2110.24 ; U8.8@1111.46,1379.72 U8.8 1141.73,1406.27 ; U8.2 1197.37,1079.72 v1(1202.25,1084.61) ; v1@1153.54,1424.06 C39.2@1153.54,1492.13 ; v1(1188.98,30.52) R7.1 ; v1(1322.66,30.54) 1322.83,30.54 R9.1
  Bottom Layer w20: R15.1 593.21,1830.71 v2(605.06,1842.55) D3.A@701.35,1842.55 ; v1(549,975) 575.72,1001.72 C10.1 ; D3.A@703.51,1874.96 D3.A ; v2(934.32,1689.59) 956.35,1689.59 992.09,1725.33 C40.2 1045.58,1725.33 v2(1085.1,1685.8)
  other v1: 358,914 1153.58,1424.03 1193.16,1424.03 1115.91,1424.67
ISOGND: C15.1 C16.1 C18.2 C19.1 C20.2 C21.2 C22.1 C23.2 C25.2 C26.1 C27.2 C28.1 C29.1 C31.1 C32.1 C33.2 C36.1 C37.2 C38.1 J4.1 P2.4 R31.2 R33.1 U5.3 U6.2 U6.5 U7.11 U7.21 U8.9 U8.15 U9.5 U10.4 U10.5 U10.7 U10.8 | length 3199.4
  Top Layer w10: U6.2 v1@1452.4,1499.4 ; v1(1453,1500) v1@1452.4,1499.4 ; C22.1 v1(1517,1399) ; U6.5 v1@1452.4,1499.4 ; U7.21@1637.91,968.82 1718.18,968.82 1738,949 v1(1738,936) ; v1(1670,1637) 1671.39,1638.39 J4.1 ; R31.2 C18.2 ; v1(1845,1221) 1844,1222 C18.2 ; v1(1907,1457) 1909.23,1459.23 U10.4 ; v1(1918,1218) C16.1 1904.55,1271 C18.2 ; U7.11 1990.54,1148.54 1998,1156 v1(1998,1217) C37.2 ; U10.5 2160.77,1459.23 2167,1453 2167,1409 2175,1401 C38.1 2218,1342 v1(2205,1329) ; U10.7 U10.8 2134,1554 2155,1575 v1(2215,1575)
  Bottom Layer w10: U5.3@1284.02,2021.42 U5.3 1282.28,2102.28 C19.1 ; U8.15@1344.72,1081.46 1287.35,1081.46 1277.77,1091.05 1277.77,1363.46 1294.03,1379.72 U8.9 1497.72,1379.72 v1(1517,1399) ; U9.5 1385,920 1395,930 1395,960 1418,983 C36.1 v1(1487,983) ; v1(1365,710) C31.1 ; C25.2 1661,703 v1(1701,743) 1742,702 C23.2 ; 1680,1390 1653,1390 C15.1 1647,1403 1660,1390 v1(1700,1390) 1716,1406 C21.2 ; v1(1883,732) v1@1884,733 ; C29.1 v1@1884,733 ; v1@1907,1454 v1(1907,1457) ; C28.1 1919,753 1899,733 v1@1884,733 ; v1(1998,1217) 1996,1215 1999,1212 C33.2 2020,1123 2033,1110 C32.1 ; C26.1 2066,753 2087,732 v1@2110,732 ; C27.2 v1@2110,732 ; v1(2111,731) v1@2110,732 ; R33.1 2133,1344 2148,1329 v1(2205,1329) v1@2206,1330
  Bottom Layer w30: C20.2 1442,1592 1453,1581 v1(1453,1500)
LEDRED: R10.2 U3.1 | length 945.7
  Top Layer w10: R10.2 571.71,157.48 704.72,290.49 U3.1
LEDYLW: R11.2 U3.2 | length 995.2
  Top Layer w10: R11.2 449.89,103.55 546.33,103.55 724.41,281.63 U3.2
NetC5_1: C5.1 L1.4 U2.7 | length 300.8
  Top Layer w10: L1.4 472.44,864.84 v1(491.06,846.23)
  Bottom Layer w10: U2.7 412.01,984.03 464.45,931.58 C5.1 464.45,872.84 v1(491.06,846.23)
NetC6_1: C6.1 L1.3 U2.6 | length 364.1
  Top Layer w10: L1.3 566.93,871.27 v1(593.87,844.33)
  Bottom Layer w10: U2.6 462.01,979.99 478.66,963.34 498.66,963.34 511.96,950.04 511.96,930.04 528.61,913.39 C6.1 571.13,909.31 571.13,867.07 v1(593.87,844.33)
NetC22_2: C22.2 U6.3 | length 114.5
  Top Layer w10: C22.2 1382,1399 1364,1417 1364,1445 1381,1462 U6.3
NetC24_1: C24.1 R23.1 U7.6 | length 230.1
  Top Layer w10: U7.6@1945,1020 2006,1020 2024,1038 2088,1038 C24.1 ; 2108,1034 C24.1 ; R23.1 C24.1
NetC24_2: C24.2 R21.1 U7.5 | length 212.6
  Top Layer w10: U7.5@1945,994.41 2005.59,994.41 2021,979 C24.2 2147,979 R21.1
NetC34_1: C34.1 R29.1 U7.8 | length 270.2
  Top Layer w10: U7.8@1945,1071.18 1986.18,1071.18 2049,1134 2049,1155 2062,1168 C34.1 ; C34.1@2104,1168 C34.1 ; R29.1 2147,1168 C34.1
NetC34_2: C34.2 R32.1 U7.7 | length 248
  Top Layer w10: U7.7@1945,1045.59 1993.59,1045.59 2061,1113 ; 2063,1113 C34.2 ; C34.2@2088,1110 C34.2 ; C34.2@2104,1113 C34.2 ; R32.1 2147,1113 C34.2
NetC41_2: C41.2 R37.2 U11.6 | length 146.7
  Top Layer w10: C41.2 C41.2@866.81,1864.5
  Top Layer w20: R37.2 C41.2 ; C41.2@866.81,1864.5 U11.6
NetD1_1: D1.1 R13.1 | length 376.3
  Top Layer w10: D1.1 185.01,118.3 263.93,39.37 R13.1
NetD1_2: D1.2 R11.1 | length 243.2
  Top Layer w10: D1.2 285.01,132.95 319.53,98.43 R11.1
NetD1_3: D1.3 R10.1 | length 101.6
  Top Layer w10: D1.3 385.01,162.35 R10.1
NetD3_K: D3.K L3.1 U11.5 | length 208.3
  Top Layer w20: U11.5@950.53,1914.94 U11.5 U11.5@952.41,1915.93 ; v2@952.41,1956.51 U11.5@952.41,1915.93 ; v2(953.81,1971.58) 953.81,1917.33 U11.5@952.41,1915.93
  Bottom Layer w20: v2(953.81,1971.58) 953.81,1931.15 L3.1
NetF1_1: F1.1 J1.2 J2.2 | length 1477.6
  Top Layer w39.37: J1.2 125.85,909.19 48.93,986.1 48.93,1639.1 91.66,1681.83 ; J2.2 91.66,1681.83 ; F1.1 86.38,2106.3 51.05,2070.97 51.05,1722.44 91.66,1681.83
NetF2_1: F2.1 R27.2 | length 244.1
  Top Layer w50: v1(2036,1732) 2037,1733 F2.1
  Bottom Layer w50: R27.2 1991,1672 2036,1717 v1(2036,1732)
NetF2_2: F2.2 J5.1 | length 443.3
  Top Layer w70: F2.2 2165.01,2145.99 2222,2089 2222,1989.76 J5.1
NetP1_1: P1.1 U3.47 | length 518.3
  Top Layer w10: P1.1@480.32,1403.94 P1.1 480.32,1292.39 498.05,1274.66 498.05,1040.77 527,1011.81 U3.47
NetP1_2: P1.2 U3.46 | length 617.5
  Top Layer w10: P1.2 522.58,1481.89 543.71,1460.76 543.71,1304.67 520.68,1281.65 520.68,1042.88 532.06,1031.5 U3.46
NetP3_1: P3.2 R22.3 | length 531.9
  Top Layer w10: 2465.93,466.07 ccw(c2669.99,503.46) 2707.37,299.39
  Top Layer w100: R22.3@2543.31,848.43 R22.3@2544.49,847.24 ; R22.3@2586.73,805 2783.62,805 ; P3.2@2655.93,375 P3.2@2655.93,382.44
NetP3_2: P3.1 R22.4 R30.1 R32.2 R33.2 | length 1329.3
  Top Layer w10: v1(2127,1240) 2139,1240 2178,1279 2237,1279 2270.17,1245.83 2282,1245.83 ; R32.2 2240,1111 2252.17,1123.17 2252.17,1224.17 2273.83,1245.83 2461.83,1245.83 2462,1246 ; 2436.92,1296.13 cw(c2676.7,1265.45) P3.1@2707.37,1505.23 ; 2484.25,1251.97 R22.4@2543.31,1192.91
  Bottom Layer w10: R33.2 1993,1274 2027,1240 v1(2127,1240)
  Bottom Layer w50: R33.2 R30.1
NetQ1_1: Q1.1 R17.1 R19.1 | length 125.6
  Top Layer w10: R17.1 1617.99,401.57 R19.1 1618.11,346.35 Q1.1 Q1.1@1610.24,351.7
NetQ1_3: Q1.3 R16.2 R18.2 | length 220.3
  Top Layer w10: Q1.3 1743.87,307.09 1787.4,350.62 1787.4,400.87 R16.2 R18.2
NetR1_1: R1.1 R4.2 U1.1 | length 181.1
  Bottom Layer w10: R4.2 1007.99,119.72 U1.1 1074.8,186.54 R1.1
NetR2_1: R2.1 R7.2 U1.2 | length 180.5
  Bottom Layer w10: R7.2 1128.98,79.8 U1.2 1188.98,200.71 R2.1
NetR3_1: R3.1 U1.5 U3.16 | length 967.7
  Top Layer w10: U3.16 1082.91,1051.18 1163.15,970.94 1163.15,526.54 1196.44,493.25 1276.43,493.25 U1.5
  Bottom Layer w10: U1.5 1366.14,403.54 R3.1
NetR5_1: R5.1 R9.2 U1.3 | length 202
  Bottom Layer w10: R9.2 1267.83,101.85 U1.3 1307.09,218.82 R5.1
NetR6_1: R6.1 U1.6 U3.15 | length 851.9
  Top Layer w10: U3.15 1078.43,1031.5 1146.06,963.87 1146.06,920 1146.06,519.47 1224.82,440.71 U1.6
  Bottom Layer w10: U1.6 1248.03,421.65 R6.1
NetR8_1: R8.1 U1.7 U3.14 | length 778.2
  Top Layer w10: U3.14 1073.96,1011.81 1128.98,956.79 U1.7
  Bottom Layer w10: U1.7 1129.92,439.76 R8.1
NetR14_2: R14.2 R16.1 U3.9 | length 1820.3
  Top Layer w10: U3.9 862.2,828.91 915.09,776.02 915.09,593.72 966.76,542.05 1092.77,542.05 v1(1092.99,542.28) ; v1(1232.07,542.98) 1755.22,542.98 1785.68,512.52 R16.1 2235.44,457.59 R14.2
  Bottom Layer w10: v1(1092.99,542.28) 1231.37,542.28 v1(1232.07,542.98)
NetR17_2: R17.2 U3.17 | length 1102.8
  Top Layer w10: U3.17 1087.39,1070.87 1180.24,978.02 1180.24,535 1204.9,510.34 1542.71,510.34 1559.06,493.99 R17.2
NetR21_2: R21.2 R22.1 | length 305.7
  Top Layer w10: R21.2@2204,973 R21.2@2205,973 ; 2227.82,976 R21.2 2245.82,976 2266.82,997 2367.11,997 2385.83,978.29 R22.1
NetR22_2: R22.2 R23.2 | length 304.3
  Top Layer w10: R23.2@2204,1031 R23.2@2205,1031 ; 2234.13,1034 R23.2 2246.13,1034 2262.44,1017.7 2369,1017.7 2385.83,1034.52 R22.2
NetR24_1: R24.1 U7.12 | length 496
  Top Layer w10: v1(1821,1155) 1828,1155 1846.54,1173.54 U7.12@1962.09,1173.54
  Bottom Layer w10: R24.1 1789,1116 1821,1148 v1(1821,1155)
NetR24_2: R24.2 U8.14 | length 98.2
  Bottom Layer w10: U8.14 1396.28,1129.72 1410,1116 R24.2
NetR25_1: R25.1 U7.13 | length 144.7
  Top Layer w10: v1(1572,1175) 1637.05,1175 U7.13
  Bottom Layer w10: R25.1 1571,1174 v1(1572,1175)
NetR25_2: R25.2 U8.13 | length 94.9
  Bottom Layer w10: U8.13 1352.18,1174 R25.2
NetR26_1: R26.1 U7.14 | length 311.9
  Top Layer w10: v1(1573,1235) 1655,1235 1703,1187 1703,1159 1691.95,1147.95 U7.14@1655,1147.95
  Bottom Layer w10: R26.1 1572,1232 1573,1233 v1(1573,1235)
NetR26_2: R26.2 U8.12 | length 93.5
  Bottom Layer w10: U8.12 1348.73,1232 R26.2
NetR27_1: R27.1 R29.2 R30.2 | length 600.6
  Top Layer w10: v1@2204,1215 R29.2 ; v1(2204,1231) R29.2 ; R29.2@2206,1172 R29.2
  Bottom Layer w10: R30.2 2198,1434 2254,1378 2254,1281 v1(2204,1231)
  Bottom Layer w50: R27.1 2126,1436 R30.2
NetR28_1: R28.1 U7.20 | length 588.2
  Top Layer w10: v1(1575,1293) 1630,1293 1757,1166 1757,1026 1725.41,994.41 U7.20@1637.91,994.41
  Bottom Layer w10: R28.1 1574,1291 1575,1292 v1(1575,1293)
NetR28_2: R28.2 U8.11 | length 98.2
  Bottom Layer w10: U8.11 1401.72,1279.72 1413,1291 R28.2
NetR31_1: R31.1 U7.2 | length 632.5
  Top Layer w10: R31.1 1727,1326 1718,1317 1718,1234 1778,1174 1778,997 1820,955 1874,955 1911.36,917.64 U7.2@1962.09,917.64
NetR34_2: R34.2 U9.7 | length 93.8
  Bottom Layer w10: U9.7 1438,820 R34.2
NetR35_2: R35.2 U9.6 | length 97.5
  Bottom Layer w10: U9.6 1392,870 1404,882 R35.2
NetR36_1: R36.1 U11.8 | length 93.1
  Top Layer w10: R36.1 892.61,1748.95 908.16,1764.5 U11.8
NetU2_1: U2.1 U3.20 | length 844.8
  Top Layer w10: v1(869.26,1131.11) 990.93,1131.11 U3.20 U3.20@991.71,1130.33
  Bottom Layer w10: U2.1 362.01,1310.13 385.48,1333.6 549.17,1333.6 638,1244.77 638,1165 685.41,1117.59 855.74,1117.59 v1(869.26,1131.11)
NetU2_4: U2.4 U3.19 | length 675
  Top Layer w10: v1(911.57,1096.66) 925.15,1110.24 U3.19
  Bottom Layer w10: U2.4 512.01,1301.9 519.16,1309.05 539.35,1309.05 618,1230.39 618,1154.55 675.46,1097.09 911.13,1097.09 v1(911.57,1096.66)
NetU3_11: U3.11 U9.2 | length 324.2
  Top Layer w10: U3.11 901.57,852.69 933.68,820.58 v1(1004.66,820.58)
  Bottom Layer w10: v1(1004.66,820.58) 1143.12,820.58 U9.2
NetU3_12: U3.12 U9.3 | length 264.9
  Top Layer w10: U3.12 921.26,886.23 938.33,869.16 v1(1051.55,869.16)
  Bottom Layer w10: v1(1051.55,869.16) 1052.39,870 U9.3
NetU3_13: U3.13 U8.3 | length 369.8
  Top Layer w10: v1(918.64,993.36) 919.88,992.13 U3.13
  Bottom Layer w10: v1(918.64,993.36) 918.64,1021.06 1027.31,1129.72 U8.3
NetU3_26: U3.26 U8.6 | length 325.6
  Top Layer w10: U3.26 901.57,1334.34 911.26,1344.03 968.08,1344.03 v1(1031.05,1281.06)
  Bottom Layer w10: v1(1031.05,1281.06) 1140.39,1281.06 U8.6
NetU3_27: U3.27 U8.5 | length 333.9
  Top Layer w10: U3.27 881.89,1223.25 v1(900.12,1205.02)
  Bottom Layer w10: v1(900.12,1205.02) 924.83,1229.72 U8.5
NetU3_38: U3.38 U8.4 | length 706.1
  Top Layer w10: U3.38 731.5,1188.98 749.32,1171.16 749.32,1080.6 733.81,1065.09 v1(733.81,1054.25)
  Bottom Layer w10: v1(733.81,1054.25) 925.92,1054.25 1049.83,1178.16 1140.17,1178.16 U8.4
NMCLR: R35.1 U7.9 | length 538.4
  Top Layer w10: v1(1821,1029) 1837,1029 1905.13,1097.13 U7.9@1944.77,1097.13 ; U7.9@1945,1097.13 U7.9@1944.77,1097.13 ; U7.9 U7.9@1944.77,1097.13
  Bottom Layer w10: R35.1 1561.84,882 1708.84,1029 v1(1821,1029)
OSC1: C25.1 U7.17 Y2.1 | length 492.5
  Top Layer w10: Y2.1 1607,794 1550,851 1550,1048 1573.18,1071.18 U7.17@1637.91,1071.18
  Bottom Layer w10: C25.1 1607,678 Y2.1
OSC2: C23.1 U7.18 Y2.2 | length 593.4
  Top Layer w10: U7.18@1637.91,1045.59 1582.59,1045.59 1572,1035 1572,864 1634,802 1757.13,802 Y2.2
  Bottom Layer w10: C23.1 1799.13,681.13 Y2.2
PGA: R34.1 U7.16 | length 496.5
  Top Layer w10: v1(1519,761) 1530,772 1530,1057 1569.77,1096.77 U7.16@1637.91,1096.77
  Bottom Layer w10: R34.1 1496,784 v1(1519,761)
TCLK: J3.3 U3.29 | length 287.1
  Top Layer w10: U3.29 842.52,1352.35 882.77,1392.6 882.77,1472.22 933.07,1522.52 J3.3
TDO: J3.4 U3.28 | length 179
  Top Layer w10: U3.28 862.48,1279.8 862.48,1333.2 929.13,1399.86 929.13,1425.2 J3.4
TMS: J3.2 U3.39 | length 565
  Top Layer w10: U3.39 694.68,1169.29 v1(710.18,1153.79)
  Bottom Layer w10: v1(710.18,1153.79) 711.21,1152.76 787.56,1152.76 967.44,1332.63 1012.49,1332.63 1032.41,1352.55 1032.41,1428.48 J3.2
XTALIN: C13.1 U3.6 Y1.1 | length 325.9
  Top Layer w10: U3.6@802.62,920.73 U3.6 803.15,703.94 Y1.1
  Bottom Layer w10: C13.1 825.98,681.1 Y1.1
XTALOUT: C12.1 U3.7 Y1.2 | length 563.2
  Top Layer w10: U3.7 822.83,842.76 891.99,773.61 891.99,545.53 Y1.2
  Bottom Layer w10: C12.1 764.16,472.06 818.52,472.06 Y1.2
pads on no net: H1.1 H2.1 H3.1 H4.1 J1.0 J1.1 J2.0 J2.1 J3.5 J3.7 J4. U2.5 U2.8 U3.4 U3.10 U3.18 U3.21 U3.22 U3.23 U3.24 U3.25 U3.30 U3.31 U3.32 U3.34 U3.35 U3.36 U3.37 U3.40 U3.42 U3.43 U3.45 U3.48 U7.4 U7.19 U7.22 U7.23 U7.24 U8.7 U8.10 U10.1 U11.2 U11.3

## Polygon pours and split planes (outlines as drawn)
GND on Ground layer "GND-fill" (solid, pour order 1003): 1,1 1,2226 687,2226 690,2229 688,2227 688,2085 688,2042 756,1974 761,1969 886,1969 887,1969 961,2043 965,2047 965,2227 1221,2227 1223,2225 1222,2224 1222,1947 1294.43,1947 1295.27,1947.83 1295.27,1694.19 1222.54,1694.19 1222.52,1694.18 1222.52,566.15 2403.26,566.15 2404.52,564.89 2406,563.41 2406,277 2383,277 2328,222 2295,189 2295,155 2295,12 2289,6 2287,8 971,8 971,167 868,270 865,267 770,267 770,266 686,182 681,177 681,10 10,10 1,1
ISOGND on Ground layer "ISOGND" (solid, pour order 8): 1270,1640 1270,610 1980,610 1980,900 1910,900 1870,940 1780,940 1750,970 1750,1100 1710,1140 1710,1638.39 1708.39,1640 1270,1640
ISOGND on Ground layer "ISOGND" (solid, pour order 6): 2010,610 2310,610 2310,1640 1740,1640 1740,1150 1780,1110 1780,980 1790,970 1890,970 1930,930 2010,930 2010,610
ISOGND on Ground layer "ISOGND2" (solid, pour order 4): 1265,2205 1265,1985 1340,1985 1340,1620 1425,1620 1425.73,1619.27 1710,1619.27 1705.73,1619.27 1700,1625 1700,2205 1265,2205
ISOGND on Ground layer "ISOGND3" (solid, pour order 2): 1740,1100 1800,1100 1800,970 1740,970
12V on Power Layer "12V-fill" (solid, pour order 1005): -0.66,2229.28 691.26,2229.28 691.26,2138.92 693.71,2136.46 693.71,2055.56 693.71,2046.36 738.1,2001.97 771.12,1968.96 804.13,1968.96 861.51,1968.96 869.63,1977.08 897.23,2004.68 913.47,2004.68 913.47,2007.93 938.37,2032.83 948.65,2043.11 948.65,2078.84 948.65,2168.85 952.28,2172.48 952.28,2229.28 1205.22,2229.28 1221.99,2212.5 1221.99,2003.6 1221.99,1978.16 1221.45,1977.62 1083.97,1977.62 1065.03,1977.62 1063.4,1975.99 1063.4,1789.26 1063.4,1726.11 995.09,1657.8 964.11,1626.82 296.75,1626.82 2.8,1626.82 -0.66,1630.28 -0.66,2229.28
3V3 on Power Layer "3V3-fill" (solid, pour order 1006): 1090.97,1717.39 1090.97,1947.83 1091.23,1948.09 1295.27,1948.09 1295.27,1694.14 1295.29,1694.11 1295.23,1694.18 1222.52,1694.18 1222.52,566.15 1223.78,564.89 2404.52,564.89 2404.52,261.41 2403.77,260.67 2387.27,244.17 2351.53,244.17 2351.53,238.67 2333.81,220.95 2303.56,190.7 2303.56,161.37 2303.56,80.04 2299.34,75.82 2299.34,0.36 952.73,0.36 952.28,0.8 952.28,81.63 952.28,161.3 940.3,173.29 926.55,187.03 926.55,207.81 920.13,207.81 897.52,230.42 880.72,247.22 869.41,247.22 841,247.22 823.59,264.64 812.59,253.64 777.45,253.64 759.12,253.64 731.01,225.53 712.07,206.59 712.07,196.2 712.07,183.98 697.71,169.62 691.26,163.17 691.26,104.23 691.26,30.91 691.26,0.9 -0.66,0.9 -0.66,1598.67 973.08,1598.67 973.16,1598.6
9V on Power Layer "9V" (solid, pour order 15): 1260,2205 1265,2200 1265,1985 1340,1985 1340,1645 1270,1645 1270,1435 1420,1435 1425,1440 1425,2005 1490,2070 1700,2070 1700,2210 1695,2205 1260,2205
D5V on Power Layer "D5V" (solid, pour order 13): 1485,1440 1485,1635 1485,1640 1710,1640 1710,1140 1750,1100 1750,970 1780,940 1870,940 1910,900 1980,900 1980,610 1270,610 1270,1400 1275,1405 1485,1405 1485,1440
A5V on Power Layer "A5V" (solid, pour order 11): 1740,1640 2310,1640 2310,610 2010,610 2010,905 1985,930 1930,930 1890,970 1790,970 1780,980 1780,1110 1740,1150 1740,1640

## Keep-outs
Keep-Out Layer:
  lines w35: -0.66,0.8 691.26,0.9 ; -0.66,0.9 -0.66,2229.28 691.26,2229.28 691.26,2099.16 ; 691.26,0.8 691.26,131.24 cw(c821.77,131.24) 952.28,131.24 952.28,0.8 2300.32,0.8 ; 691.26,2098.96 ccw(c821.77,2098.96) 952.28,2098.96 952.28,2229.28 2299.34,2229.28 ; 2299.34,0.36 2299.34,130.8 ; 2299.34,135.8 cw(c2429.85,135.8) 2560.36,135.8 ; 2300.32,2094.5 2300.32,2227.98 ; 2300.32,2098.96 ccw(c2430.83,2098.96) 2561.34,2098.96 2561.34,2229.28 3253.27,2229.28 ; 2561.34,0.8 2561.34,131.24 ; 2561.54,0.8 3253.46,0.8 3253.46,2229.28

## Other copper
Top Layer:
  rectangle net NetP3_2: 2707.37,953.51 3193.45,1505.23
  rectangle net NetP3_1: 2707.37,299.39 3192.1,851.11
  rectangle net NetP3_1: 2562.28,399.46 2807.42,778.45
  rectangle net 12V: 711.39,1660.71 833.32,1827.15
  rectangle net 3V3: 1106.3,1732.08 1296.22,1790.09
  region net NetP3_1: 2722.84,309.76 2754.49,300.45 2719.64,295.89 2694.28,292.78 2694.93,295.22 2660.81,295.22 2656.2,299.83 2611.01,299.83 2599.94,310.89 2582.42,310.89 2561.21,332.11 2549.22,332.11 2518.79,362.54 2516.94,362.54 2516.94,364.38 2487.43,393.89 2487.43,413.26 2468.99,431.7 2461.25,459.27 2453.52,490.72 2448.78,520.41 2441.59,575.87 2433.37,702.31 2433.78,695.18 2433.78,698.61 2433.23,700.12 2433.23,703 2430.46,782.94 2447.78,798.75 2697.85,820.28
  region net NetP3_2: 2429,1245.83 2430.21,1284 2433.97,1313.29 2448.84,1328.16 2448.84,1357.89 2461,1370.05 2461,1382.89 2482.62,1404.51 2482.62,1413.3 2501.55,1432.22 2501.55,1434.25 2504.25,1434.25 2525.2,1455.2 2525.2,1455.87 2527.22,1455.87 2544.12,1472.76 2554.25,1472.76 2565.06,1483.58 2575.88,1483.58 2587.36,1495.06 2607.64,1495.06 2616.42,1503.85 2645.48,1503.85 2650.21,1508.58 2699.32,1510.89 2723.76,1508.54 2754.19,1505.08 2754.2,1502.23 2721.84,1135.57 2717.11,1130.84 2482.62,1130.84 2444.78,1168.68 2443,1232 2436,1232
Bottom Layer:
  rectangle net 3V3: 1107.14,1721.6 1295.84,1949.45
  rectangle net GND: 1102.42,1401.96 1212.93,1529.58
  rectangle net NetD3_K: 845.07,1815.63 1054.38,1955.17
  rectangle net 12V: 700.97,1660.71 833.32,1784.53

## Silkscreen, mask and mechanical layers (free items; w line width, h text height)
Top Overlay:
  rectangle: 2574.53,14.65 3244.53,215.98
  region: 137 vertices and 55 holes, not listed, extent 1464.17,1672.45 1944.17,2080.45
  text "AGND" at 1455,2170 h39.37
  text "9V" at 1620,2170 h39.37
  text "D5V" at 1710,2170 h39.37
  text "A5V" at 1840,2170 h39.37
  text "DCAS '08, AB '11" at 2596.65,2160.2 h39.37
  text "Current Int" at 2600.94,2090.63 h39.37
  text "keg" at 1411,1700 h118.11
  text "rx" at 566.28,1464.48 h39.37
  text "tx" at 564.97,1368.86 h39.37
Top Solder:
  rectangle: 2468.49,1244.11 2658.01,1381.34
  region: 2597.71,1468.61 2587.98,1466.9 2559.35,1461.74 2543.31,1445.71 2530.72,1445.71 2512.39,1427.39 2508.38,1427.39 2488.91,1407.92 2488.91,1401.05 2469.21,1381.34 2468.49,1381.34 2468.49,1372.61 2449.98,1354.09 2449.98,1320.31 2437.95,1308.28 2437.95,1233.84 2561.06,1295.11
  region: 2692.16,331.1 2648.24,327.07 2640.24,324.21 2617.53,331.95 2606.24,333.86 2577.85,340.77 2560.84,357.77 2547.61,357.77 2527.46,377.93 2527.46,380.45 2526.83,380.45 2501,406.27 2501,416.98 2482.1,435.88 2482.1,460.44 2471.4,471.15 2462.99,503.38 2455.07,552.92 2439.92,667.88 2430.46,782.94 2648.58,782.94 2654.56,788.91 2678.28,765.19 2678.28,415.3
  lines w10: 2440.34,1257.05 cw(c2639.54,1275.49) 2621.09,1474.69 ; 2468.69,522.86 ccw(c2656.36,514.74) 2648.24,327.07
  lines w100: 2543.31,1192.91 2543.31,1347.09 2626.22,1430 2783.62,1430 ; 2543.86,493.34 2544.49,847.24 ; 2549.47,488.9 2655.93,382.44 ; 2655.93,375 2783.62,375
Mechanical 1:
  lines w10: 0,0 691.92,0.1 ; 0,0.1 0,2228.48 691.92,2228.48 691.92,2098.36 ; 691.92,0 691.92,130.44 cw(c822.43,130.44) 952.94,130.44 952.94,0 2300.98,0 ; 691.92,2098.16 ccw(c822.43,2098.16) 952.94,2098.16 952.94,2228.48 2300,2228.48 ; 2300,0 2300,130.44 ; 2300,135 cw(c2430.51,135) 2561.02,135 ; 2300.98,2093.7 2300.98,2227.18 ; 2300.98,2098.16 ccw(c2431.49,2098.16) 2562,2098.16 2562,2228.48 3253.93,2228.48 ; 2562,0 2562,130.44 ; 2562.2,0 3254.13,0 3254.13,2228.48

## Text inside footprints (layer, text, board x,y; h text height)
J1: Top Overlay "131-040" at 376.85,759.19 h39.37 r90
J2: Top Overlay "131-040" at 376.85,1531.83 h39.37 r90
U5: Top Overlay "1" at 1081.81,2068.94 h39.37; Top Overlay "2" at 1171.81,2073.94 h39.37; Top Overlay "3" at 1271.81,2068.94 h39.37; Top Overlay "4" at 1366.81,2068.94 h39.37